# Altium PCB AND.PcbDoc
Units mm, origin at the board's own origin, x right, y up, seen from the top; angles counter-clockwise.
Board outline 27 x 15 mm, 2 copper layers (Top Layer, Bottom Layer), stack 1.535 mm thick; 18 components, 10 nets, 44 pads, 6 vias.
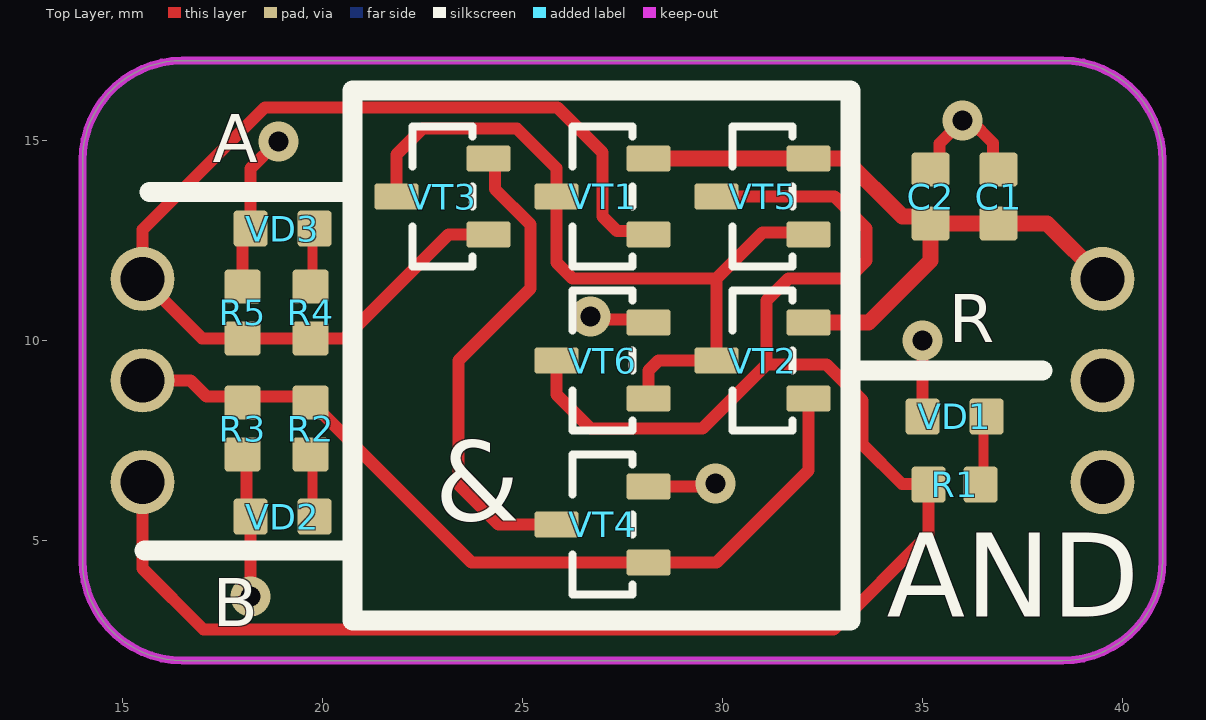
[diagram p0: Top Layer view]
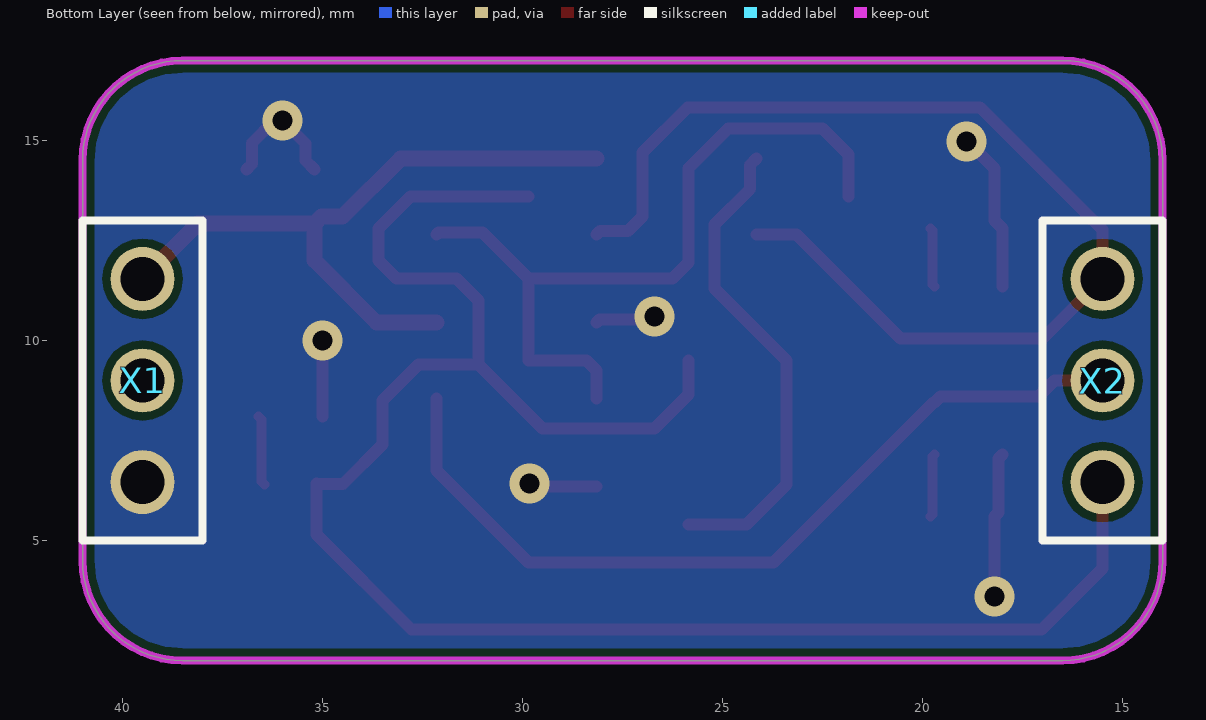
[diagram p1: Bottom Layer view, seen from below]
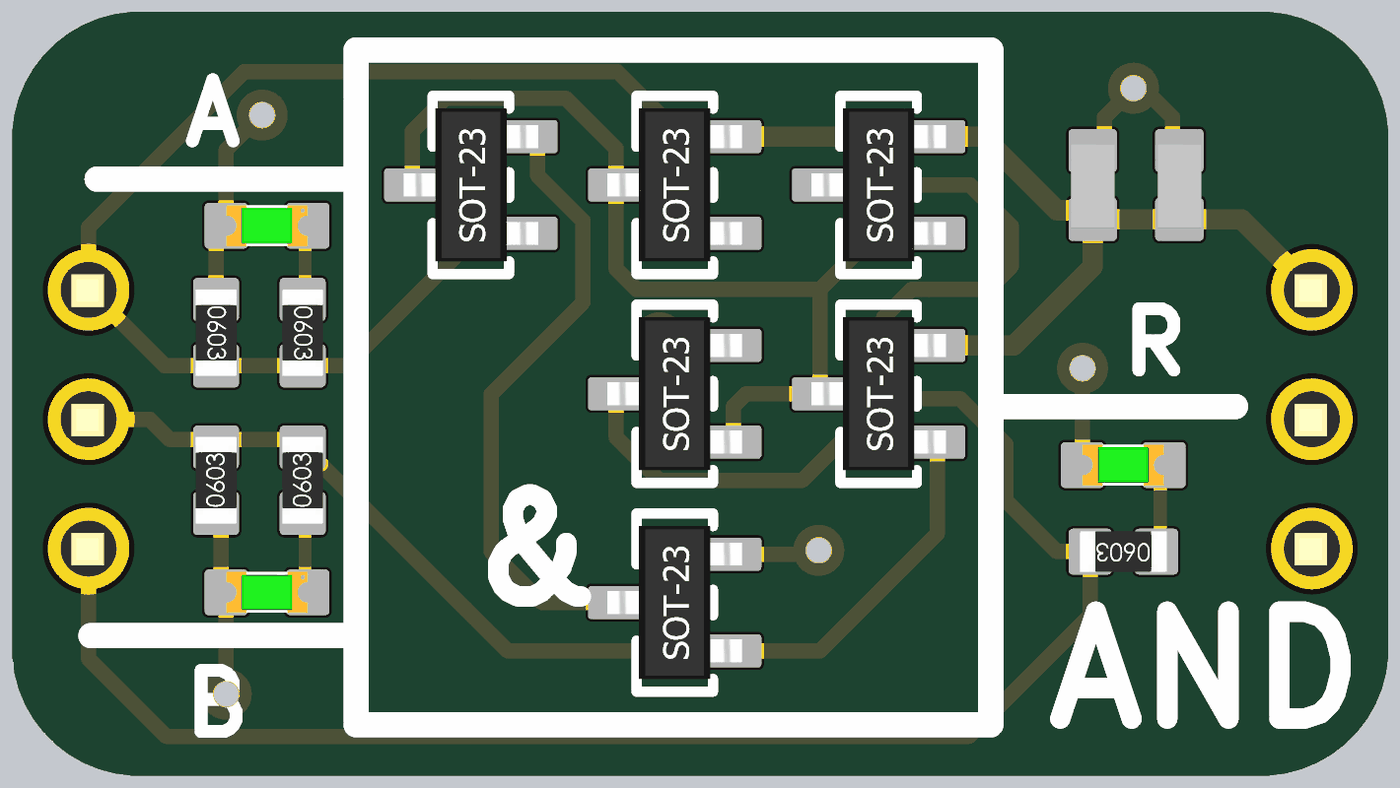
[diagram p2: 3D render of the assembled board from above, using the file's embedded part models]

## Layer stack, top to bottom
Top Solder: solder mask 0.01, Solder Resist, Dk 3.5
Top Layer: signal copper 0.018
Dielectric 1: dielectric 1.499, FR-4, Dk 4.3
Bottom Layer: signal copper 0.018
Bottom Solder: solder mask 0.01, Solder Resist, Dk 3.5

## Board outline
14,4.5 14,14.5 cw(c16.5,14.5) 16.5,17 38.5,17 cw(c38.5,14.5) 41,14.5 41,4.5 cw(c38.5,4.5) 38.5,2 16.5,2 cw(c16.5,4.5)

## Design rules (kind name [scope] priority, off if disabled: settings)
Clearance [All] p1: gap=0.2 ignorepadtopadclearanceinfootprint=FALSE
PolygonConnect PolygonConnect_isVia [All] p1: thpad.connectstyle=Direct thpad.reliefconductorwidth=0.254 thpad.reliefentries=4 thpad.polygonreliefangle="90 Angle" thpad.airgapwidth=0.254 smdpad.connectstyle=Relief smdpad.reliefconductorwidth=0.254 smdpad.reliefentries=4 smdpad.polygonreliefangle="90 Angle" smdpad.airgapwidth=0.254 via.connectstyle=Direct via.reliefconductorwidth=0.254 via.reliefentries=4 via.polygonreliefangle="90 Angle" via.airgapwidth=0.254
PolygonConnect [All] p2: connectstyle=Relief reliefconductorwidth=0.254 reliefentries=4 polygonreliefangle="90 Angle" airgapwidth=0.254
RoutingVias [All] p1: holewidth=0.711 width=1.27 viastyle="Through Hole" minholewidth=0.711 minwidth=1.27 maxholewidth=0.711 maxwidth=1.27
SolderMaskExpansion [All] p1: expansion=0.102 istentingtop=FALSE
Width [All] p1: maxlimit=0.254 minlimit=0.254 preferedwidth=0.254
30 further rules are at their usual default settings.

## Classes and differential pairs
component class Sheet1: C1 C2 R1 R2 R4 R5 VD1 VD2 VD3 VT1 VT2 VT3 VT4 VT5 VT6 X1 X2

## Components (designator, comment, footprint, x,y, rotation, side; value= is the part's Value field where it differs from the comment)
C1 "0,1 мкФ ±5 % *  0603, CC0603JRX7R8BB104" K10-79_1.6_0.8(0603) 36.9,13.6 r270 top value="0,1 мк"
C2 "0,01 мкФ ±10 % *  0603, CC0603KPX7R8BB103" K10-79_1.6_0.8(0603) 35.2,13.6 r270 top value="0,01 мк"
R1 "1 кОм ±5 % 0603, RC0603JR-071KL" P1-12-0.1(0603) 35.8,6.4 r180 top value="1 к"
R2 "1 кОм ±5 % 0603, RC0603JR-071KL" P1-12-0.1(0603) 19.7,7.8 r90 top value="1 к"
R3 "1 кОм ±5 % 0603, RC0603JR-071KL" P1-12-0.1(0603) 18,7.8 r90 top value="1 М"
R4 "1 кОм ±5 % 0603, RC0603JR-071KL" P1-12-0.1(0603) 19.7,10.7 r270 top value="1 к"
R5 "1 кОм ±5 % 0603, RC0603JR-071KL" P1-12-0.1(0603) 18,10.7 r270 top value="1 М"
VD1 "VD - Светодиод" "LED 0603" 35.8,8.1 r180 top value=GNL-0805UBC-TL
VD2 "VD - Светодиод" "LED 0603" 19,5.6 r180 top value=GNL-0805UBC-TL
VD3 "VD - Светодиод" "LED 0603" 19,12.8 r180 top value=GNL-0805UBC-TL
VT1 "VT - Полевой транзистор P канал (MOSFET_P)" SOT23(KT-46) 27,13.6 r90 top
VT2 "VT - Полевой транзистор P канал (MOSFET_P)" SOT23(KT-46) 31,9.5 r90 top
VT3 "VT - Полевой транзистор N канал (MOSFET_N)" SOT23(KT-46) 23,13.6 r90 top
VT4 "VT - Полевой транзистор N канал (MOSFET_N)" SOT23(KT-46) 27,5.4 r90 top
VT5 "VT - Полевой транзистор P канал (MOSFET_P)" SOT23(KT-46) 31,13.6 r90 top
VT6 "VT - Полевой транзистор N канал (MOSFET_N)" SOT23(KT-46) 27,9.5 r90 top
X1 "KONT_POLE_POWER" "PCBComponent_1 - duplicate" 39.5,9 r0 bottom value=PLL2-3
X2 "KONT_POLE_POWER" "PCBComponent_1 - duplicate" 15.5,9 r0 bottom value=PLL2-3

## Footprints (in the part's own frame and the unit in brackets; to place one, negate y for a bottom-side part, rotate by r counter-clockwise, add the part's x,y. Pads: shape width x height; smd on the part's side, far side on the other; paste and mask are expansions set on the pad)
K10-79_1.6_0.8(0603) [mm]
  rrect20% 0.85x0.95 smd mask+0.05: 1(-0.675,0) 2(0.675,0)
  body extent -0.8,-0.42 0.84,0.43, height 0.41
"LED 0603" [mm]
  rrect20% 0.85x0.9 smd mask+0.05: 1(-0.8,0) 2(0.8,0)
  body extent -0.8,-0.4 0.8,0.4, height 0.6
P1-12-0.1(0603) [mm]
  rrect20% 0.85x0.9 smd mask+0.05: 1(-0.65,0) 2(0.65,0)
  Top Layer pour cut-out: -0.225,0.4 0.225,0.4 0.225,-0.4 -0.225,-0.4
  body extent -0.85,-0.4 0.85,0.4, height 0.56
"PCBComponent_1 - duplicate" [mm]
  round 1.6 hole 1.1: 1(0,-2.54) 2(0,0) 3(0,2.54)
  silkscreen extent -1.5,-4 1.5,4, body extent -1.29,-3.8 1.25,3.82, height 8.54
SOT23(KT-46) [mm]
  rrect20% 0.65x1.1 smd mask+0.05: 1(-0.95,-1.15) 2(0.95,-1.15) 3(0,1.15)
  silkscreen extent -1.75,-0.75 1.75,0.75, body extent -1.5,-1.32 1.5,1.32, height 1.08

## Part data
C1: library part "C - Конденсатор", Package=0603, PartNumber=CC0603JRX7R8BB104, Tolerance="5 %", Company=Yageo
C2: library part "C - Конденсатор", Package=0603, PartNumber=CC0603KPX7R8BB103, Tolerance="10 %", Company=Yageo
R1 R2 R3 R4 R5: library part "R - Резистор", Package=0603, PartNumber=RC0603JR-071KL, Tolerance="5 %", Company=Yageo
VD1 VD2 VD3: Package=0603, PartNumber=GNL-0805UBC-TL, Company=G-nor
VT1 VT2 VT3 VT4 VT5 VT6: "VT"
X1 X2: library part "X - Контактное поле х3", PartNumber=PLL2-3, Company=RUICHI
  X1: 1=Питание, 2=-, 3=Общий
  X2: 1="Вход 1", 2="Вход 2", 3=Выход

## Via types
v1: diameter 1, hole 0.5, Top Layer to Bottom Layer, tented both sides, 6 vias

## Nets (pads, with @x,y where several pads share a name; then routed paths per layer and width w, separated by ;. In a path a pad name is that pad's centre, name@x,y a point inside that pad or via, vN(x,y) a via of type N, cw(c..) or ccw(c..) an arc to the next point about the centre after c; other vN are vias at no path point)
A_IN: R4.2 R5.2 VT1.1 VT3.1 X2.1 | length 27.7
  Top Layer w0.3: VT3.1 23.15,12.65 20.55,10.05 R4.2 R5.2 16.99,10.05 X2.1 15.5,12.77 18.557,15.827 25.873,15.827 27,14.7 27,13.1 27.363,12.737 28.063,12.737 VT1.1
B_IN: R2.2 R3.2 VT2.1 VT4.1 X2.2 | length 21.3
  Top Layer w0.3: X2.2 16.7,9 17.1,8.6 19.55,8.6 R2.2 19.725,8.45 23.725,4.45 VT4.1 29.85,4.45 32.15,6.75 VT2.1
GND: C1.1 C2.1 R3.1 R5.1 VD1.2 VD2.2 VD3.2 VT4.2 VT6.2 X1.3 | length 16.1
  Top Layer w0.3: R3.1 18.1,7.05 18.1,5.7 VD2.2 v1(18.2,3.6) ; R5.1 18,12.8 18.2,13 18.2,14.3 18.872,14.972 v1(18.905,14.972) ; v1(26.7,10.6) 26.775,10.525 28.075,10.525 VT6.2 ; VT4.2 29.75,6.35 v1@29.9,6.5 ; VD1.2 v1(35,10) ; C2.1 35.428,14.503 35.428,14.928 v1(36,15.5) 36.2,15.5 36.768,14.932 36.768,14.407 C1.1
  other v1: 29.825,6.425
NetR1_1: R1.1 VD1.1 | length 1.8
  Top Layer w0.254: R1.1 36.525,6.475 36.525,8.025 VD1.1
NetR2_1: R2.1 VD2.1 | length 1.6
  Top Layer w0.254: R2.1 19.75,7.1 19.75,5.65 VD2.1
NetR4_1: R4.1 VD3.1 | length 1.5
  Top Layer w0.254: R4.1 19.75,11.4 19.75,12.75 VD3.1
NetVT1_2: VT1.3 VT2.3 VT3.3 VT5.1 VT6.1 | length 19.6
  Top Layer w0.3: VT3.3 21.85,14.65 22.5,15.3 24.858,15.3 25.85,14.308 VT1.3 25.85,11.95 26.25,11.55 29.85,11.55 ; VT6.1 28.15,9.25 28.4,9.5 VT2.3 29.85,11.55 ; VT5.1 32.1,12.7 31,12.7 29.85,11.55
NetVT3_2: VT3.2 VT4.3 | length 12.2
  Top Layer w0.3: VT3.2 24.31,14.39 24.31,13.789 25.2,12.899 25.2,11.3 23.4,9.5 23.4,6.4 24.4,5.4 VT4.3
R_OUT: R1.2 VT5.3 VT6.3 X2.3 | length 47.1
  Top Layer w0.3: X2.3 15.5,4.3 17.027,2.773 32.773,2.773 35.15,5.15 R1.2@35.15,6.425 ; VT6.3 25.85,8.65 26.7,7.8 29.5,7.8 31.1,9.4 ; VT5.3 32.8,13.6 33.6,12.8 33.6,12 33.15,11.55 31.65,11.55 31.1,11 31.1,9.4 ; R1.2 35.143,6.407 34.493,6.407 33.5,7.4 33.5,8.499 32.599,9.4 31.1,9.4
Vdd: C1.2 C2.2 VT1.2 VT2.2 VT5.2 X1.1 | length 17.2
  Top Layer w0.4: VT1.2 33.05,14.55 34.497,13.103 35.022,13.103 C2.2 ; VT2.2 33.65,10.45 35.2,12 C2.2 ; X1.1 38.115,12.925 C1.2 C2.2
pads on no net: X1.2

## Polygon pours and split planes (outlines as drawn)
GND on Bottom Layer "GND_L02_P005" (solid, remove dead copper, pour order 5): 13.208,14.351 cw(c15.748,14.351) 15.748,16.891 44.45,16.891 cw(c44.45,14.351) 46.99,14.351 46.99,3.556 cw(c44.45,3.556) 44.45,1.016 15.748,1.016 cw(c15.748,3.556) 13.208,3.556

## Keep-outs
Keep-Out Layer:
  the board outline again, w0.2

## Silkscreen, mask and mechanical layers (free items; w line width, h text height)
Top Overlay:
  lines w0.5: 15.547,4.75 20.5,4.75 ; 15.669,13.716 20.622,13.716 ; 33.4,9.25 38,9.25 ; 20.75,3 33.2,3 33.2,16.25 33.1,16.25 20.75,16.25 20.75,15.25 20.75,3
  text "A" at 17.254,14.454 h1.2
  text "R" at 35.654,9.954 h1.2
  text "&" at 22.8,5.5 h2
  text "AND" at 34.1,3.1 h2.1
  text "B" at 17.254,2.854 h1.2
Mechanical 1:
  the board outline again, w0.15
Mechanical 5:
  lines w0.1: 21.204,12.7 21.75,12.7 ; 39.925,10.2 40.3,10.2
  lines w0.2: 5,11.5 5.04,11.54 40.5,11.54

## Dimensions
15.5,11.54 to 39.5,11.54 on Mechanical 5
41,17 to 39.5,11.54 on Mechanical 5